# Altium PCB Alim12_Mot.PcbDoc
Units mm, origin at the board's own origin, x right, y up, seen from the top; angles counter-clockwise.
Board outline 105.41 x 61.06 mm, 2 copper layers (Component Side, Bottom Layer), stack 1.731 mm thick; 54 components, 34 nets, 159 pads, 19 vias.
Unrouted connection lines stored in the file: 1.
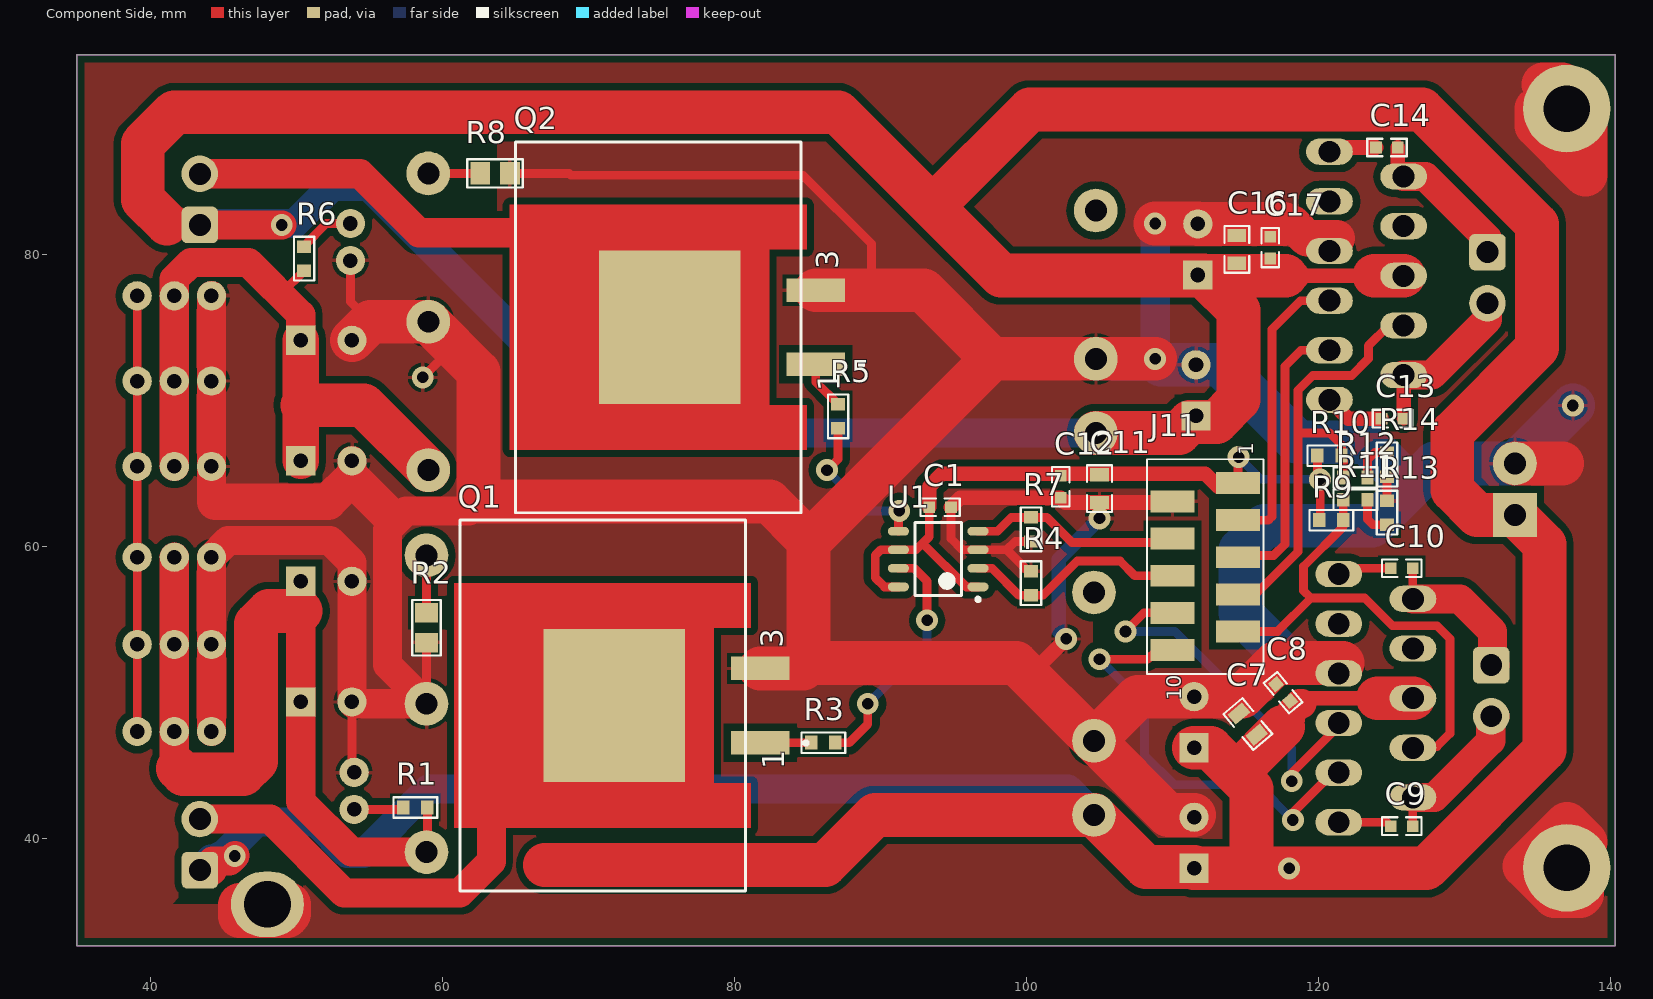
[diagram p0: Component Side view]
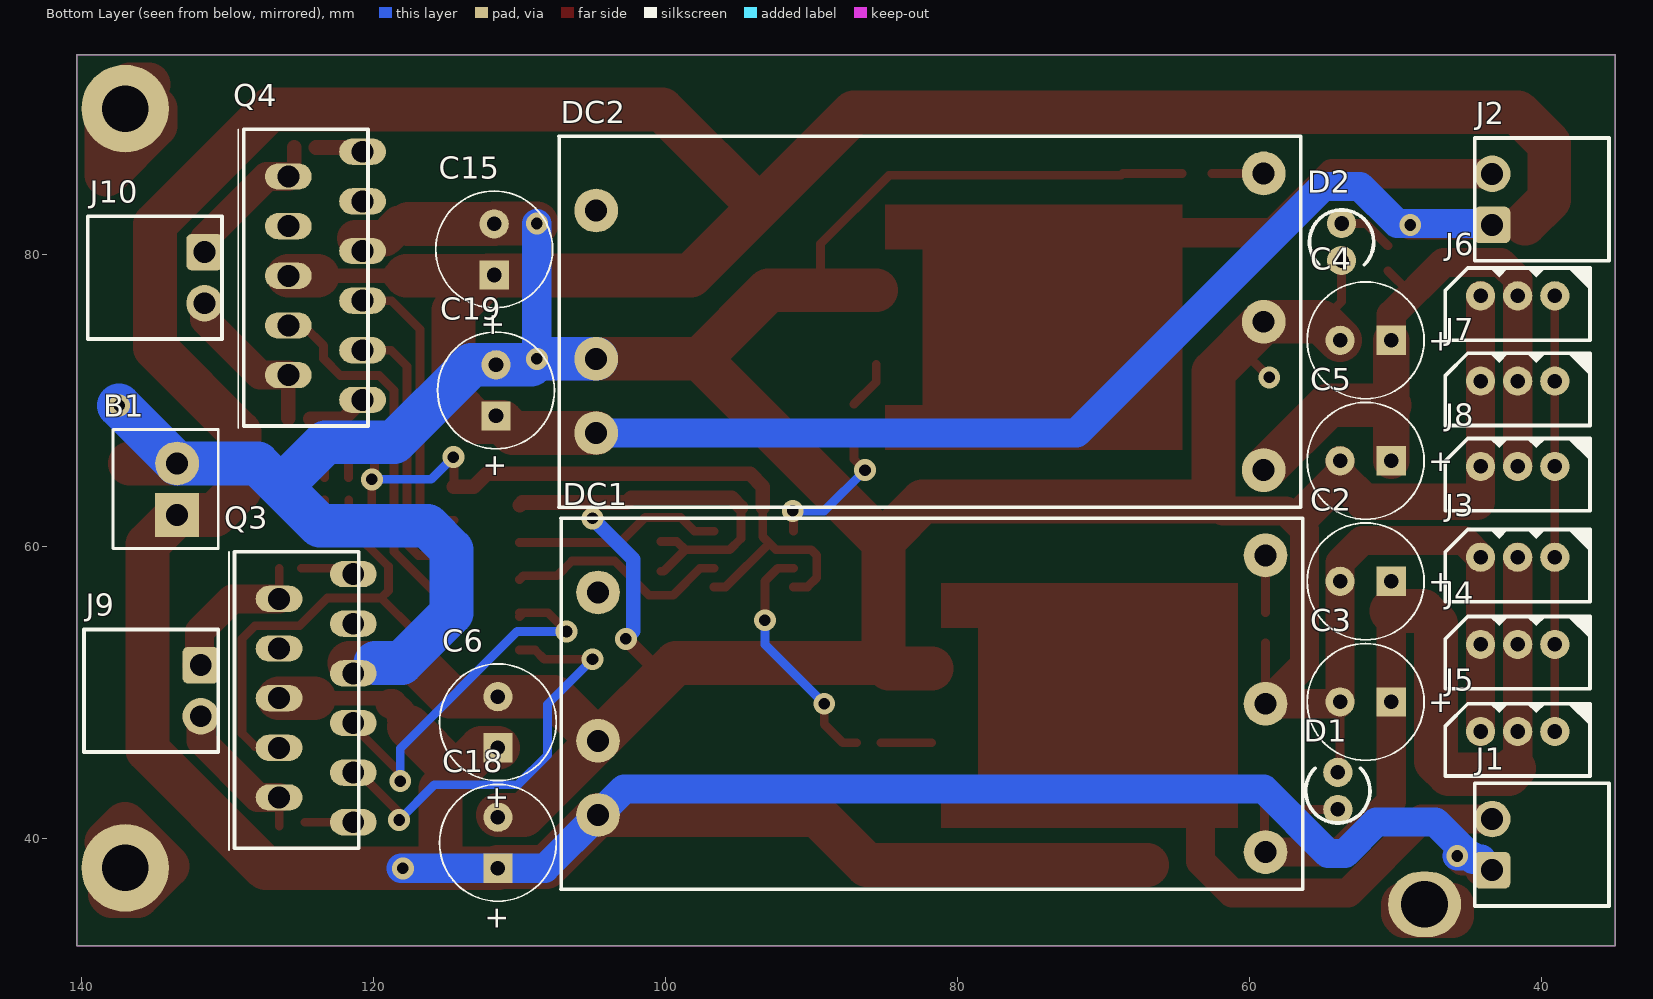
[diagram p1: Bottom Layer view, seen from below]
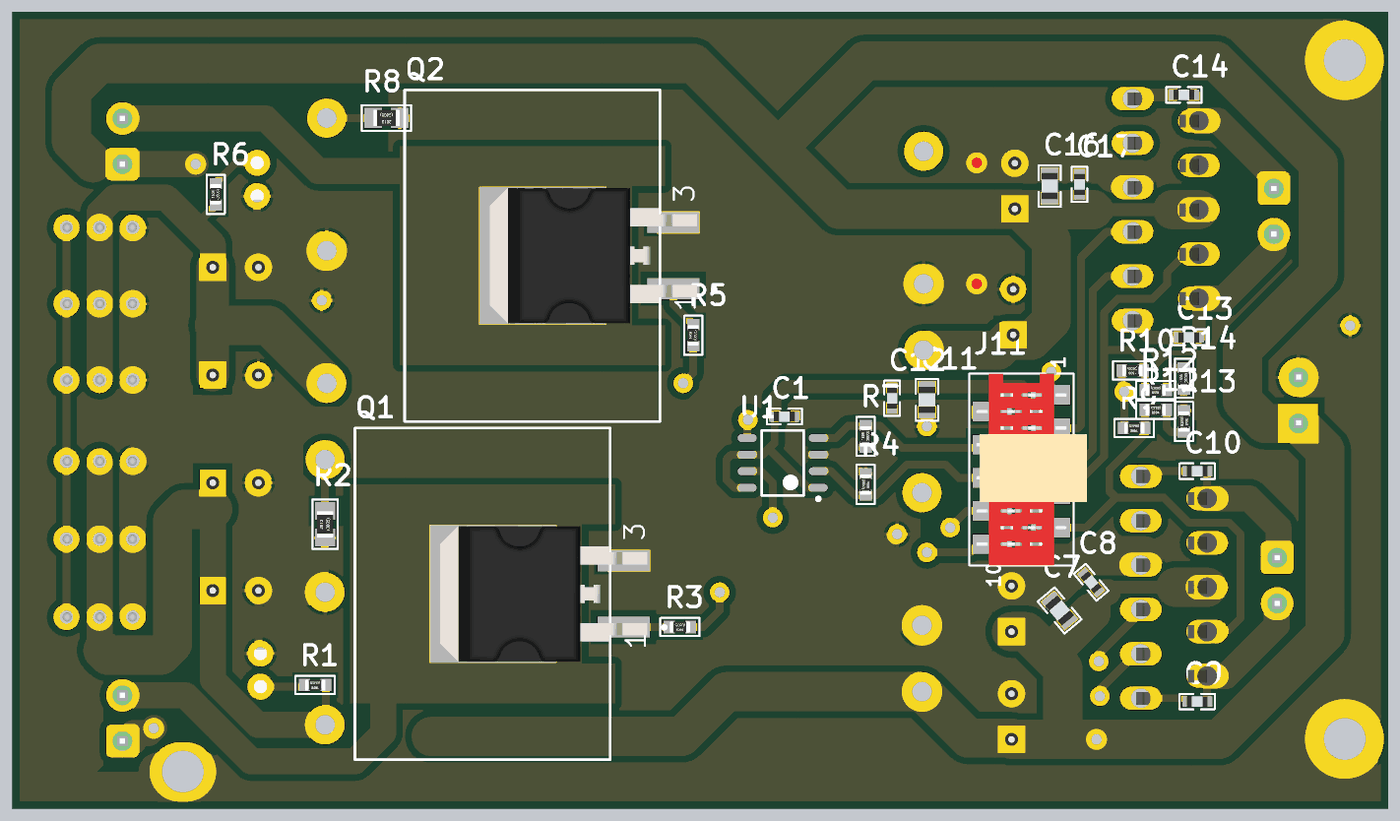
[diagram p2: 3D render of the assembled board from above, using the file's embedded part models]
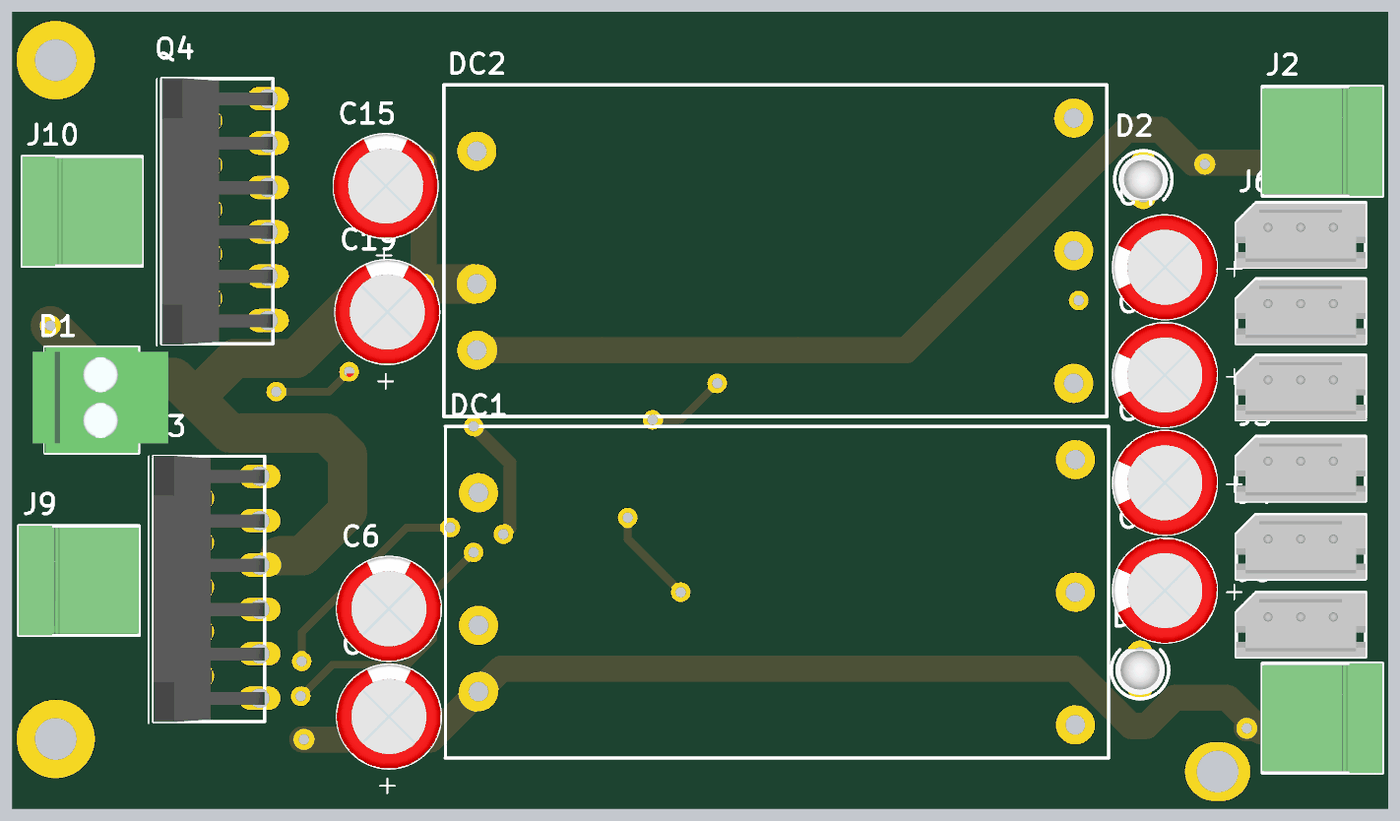
[diagram p3: 3D render of the assembled board from below, using the file's embedded part models]

## Layer stack, top to bottom
Top Solder: solder mask 0.0102, Solder Resist, Dk 3.5
Component Side: signal copper 0.0356
Dielectric 1: core 1.66, FR-4, Dk 4.2
Bottom Layer: signal copper 0.0356
Solder Side: solder mask 0.0102, Solder Resist, Dk 3.5

## Board outline
34.925,32.655 140.335,32.655 140.335,93.71 34.925,93.71

## Design rules (kind name [scope] priority, off if disabled: settings)
AssemblyTestPointUsage [All] p1 off:
AssemblyTestpoint [All] p1 off: testpointundercomponent=TRUE minsize=1.016 maxsize=2.54 preferedsize=1.524 minholesize=0 maxholesize=1.016 preferedholesize=0.813 testpointgrid=0.025 usegrid=TRUE gridtolerance=0 allowsidetop=TRUE allowsidebottom=TRUE
Clearance [All] p1: gap=0.5
ComponentClearance [All] p1: gap=0.2 collisioncheckmode=3 verticalgap=1 showdistances=FALSE
DiffPairsRouting [All] p1 off: maxlimit=0.254 minlimit=0.254 mostfreqgap=0.254 toplayer_minwidth=0.381 toplayer_maxwidth=0.381 toplayer_prefwidth=0.381 bottomlayer_minwidth=0.381 bottomlayer_maxwidth=0.381 bottomlayer_prefwidth=0.381 maxuncoupledlength=12.7
FabricationTestPointUsage TestPointUsage [All] p1 off: valid=0 allowmultiple=FALSE
FabricationTestpoint Testpoint [All] p1 off: side=3 testpointundercomponent=TRUE minsize=1.016 maxsize=2.54 preferedsize=1.524 minholesize=0 maxholesize=1.016 preferedholesize=0.813 testpointgrid=0.025 allowsidetop=TRUE allowsidebottom=TRUE usegrid=TRUE gridtolerance=0
FanoutControl Fanout_BGA [IsBGA] p1 off: bgadir=Out bgaviamode=Centered fanoutstyle=Auto fanoutdirection=Alternating viagrid=0.025 // Fanout_BGA (Default Rule)
FanoutControl Fanout_LCC [IsLCC] p2 off: bgadir=Out bgaviamode=Centered fanoutstyle=Auto fanoutdirection=Alternating viagrid=0.025 // Fanout_LCC (Default Rule)
FanoutControl Fanout_SOIC [IsSOIC] p3 off: bgadir=Out bgaviamode=Centered fanoutstyle=Auto fanoutdirection=Alternating viagrid=0.025 // Fanout_SOIC (Default Rule)
FanoutControl Fanout_Small [(CompPinCount < 5)] p4 off: bgadir=Out bgaviamode=Centered fanoutstyle=Auto fanoutdirection=OutThenIn viagrid=0.025 // Fanout_Small (Default Rule)
FanoutControl Fanout_Default [All] p5 off: bgadir=Out bgaviamode=Centered fanoutstyle=Auto fanoutdirection=Alternating viagrid=0.025 // Fanout_Default (Default Rule)
HoleSize [All] p1: absolutevalues=TRUE maxlimit=6 minlimit=0.15 maxpercent=80.000 minpercent=20.000
HoleToHoleClearance [All] p1: gap=0.6 allowstackedmicrovias=TRUE
MinimumSolderMaskSliver [All] p1: minsoldermaskwidth=0.075
MinimumSolderMaskSliver SilkscreenOverComponentPads [All] p2 off: minsoldermaskwidth=0.254
NetAntennae [All] p1 off: netantennaetolerance=0
PlaneClearance [All] p1: clearance=0.5
PlaneConnect [All] p1: planeconnectstyle=Relief reliefexpansion=0.4 reliefentries=4 reliefconductorwidth=0.3 reliefairgap=0.2
PolygonConnect [All] p1: connectstyle=Relief reliefconductorwidth=0.25 reliefentries=4 polygonreliefangle="90 Angle" airgapwidth=0.254
RoutingVias [All] p1: holewidth=0.8 width=1.5 viastyle="Through Hole" minholewidth=0.2 minwidth=0.6 maxholewidth=0.8 maxwidth=1.5
SilkToSilkClearance [All] p1 off: silktosilkclearance=0.1
SolderMaskExpansion [All] p1: expansion=0.05
Width [All] p1: maxlimit=3 minlimit=0.15 preferedwidth=0.2
12 further rules are at their usual default settings.

## Components (designator, comment, footprint, x,y, rotation, side; value= is the part's Value field where it differs from the comment)
B1 "1776275-2" BORNIER_2V_3.5MM 133.444,62.197 r90 bottom
C1 "100nF" "WCAP-CSGP_0603, 1.6x0.8x0.8" 94.074,62.705 r180 top
C2 "470 uF" WCAP-ATG8_8x11.5x3.5x0.5 52.037,57.625 r180 bottom
C3 "470 uF" WCAP-ATG8_8x11.5x3.5x0.5 52.037,49.37 r180 bottom
C4 "470 uF" WCAP-ATG8_8x11.5x3.5x0.5 52.037,74.135 r180 bottom
C5 "470 uF" WCAP-ATG8_8x11.5x3.5x0.5 52.037,65.88 r180 bottom
C6 "220 uF" WCAP-ATG8_8x11.5x3.5x0.5 111.473,47.973 r270 bottom
C7 "1uF" "WCAP-CSGP_0805, 2x1.25x1.25" 115.156,47.846 r310 top
C8 "100nF" "WCAP-CSGP_0603, 1.6x0.8x0.8" 117.569,50.005 r310 top
C9 "10nF" "WCAP-CSGP_0603, 1.6x0.8x0.8" 125.697,40.861 r0 top
C10 "10nF" "WCAP-CSGP_0603, 1.6x0.8x0.8" 125.697,58.514 r0 top
C11 "1uF" "WCAP-CSGP_0805, 2x1.25x1.25" 104.996,63.975 r90 top
C12 "100nF" "WCAP-CSGP_0603, 1.6x0.8x0.8" 102.329,64.102 r90 top
C13 "10nF" "WCAP-CSGP_0603, 1.6x0.8x0.8" 125.062,68.773 r0 top
C14 "10nF" "WCAP-CSGP_0603, 1.6x0.8x0.8" 124.681,87.343 r0 top
C15 "220 uF" WCAP-ATG8_8x11.5x3.5x0.5 111.727,80.358 r270 bottom
C16 "1uF" "WCAP-CSGP_0805, 2x1.25x1.25" 114.394,80.358 r270 top
C17 "100nF" "WCAP-CSGP_0603, 1.6x0.8x0.8" 116.68,80.485 r270 top
C18 "220 uF" WCAP-ATG8_8x11.5x3.5x0.5 111.473,39.718 r270 bottom
C19 "220 uF" WCAP-ATG8_8x11.5x3.5x0.5 111.6,70.706 r270 bottom
D1 "LED" LED_3MM 53.942,43.274 r90 bottom
D2 "LED" LED_3MM 53.688,80.866 r270 bottom
DC1 "TEN 60-2412WIN" "TEN 60" 81.755,49.243 r0 bottom
DC2 "TEN 60-2412WIN" "TEN 60" 81.882,75.405 r0 bottom
J1 "691322110002" 691322110002 39.972,39.591 r90 bottom
J2 "691322110002" 691322110002 39.972,83.787 r90 bottom
J3 "22-03-5035" 20-03-5035 41.623,58.641 r180 bottom
J4 "22-03-5035" 20-03-5035 41.623,52.672 r180 bottom
J5 "22-03-5035" 20-03-5035 41.623,46.703 r180 bottom
J6 "22-03-5035" 20-03-5035 41.623,76.548 r180 bottom
J7 "22-03-5035" 20-03-5035 41.623,70.706 r180 bottom
J8 "22-03-5035" 20-03-5035 41.623,64.864 r180 bottom
J9 "691322110002" 691322110002 135.222,50.132 r270 bottom
J10 "691322110002" 691322110002 134.968,78.425 r270 bottom
J11 "NoPins" 690367281076 112.235,58.641 r90 top
Q1 "IRF1018ESPBF" "D2Pak / AAVID 7109DG" 83.66,49.116 r90 top
Q2 "IRF1018ESPBF" "D2Pak / AAVID 7109DG" 87.47,75.024 r90 top
Q3 "LMD18200T" LMD18200T 125.316,49.624 r90 bottom
Q4 "LMD18200T" LMD18200T 124.681,78.552 r90 bottom
R1 "RC0603FR-071KL" RESC1608X06N 58.133,42.131 r180 top
R2 "4.3k" RESC2012X06M 58.895,54.45 r90 top
R3 "RC0603FR-0733RL" RESC1608X06N 86.073,46.576 r180 top
R4 "RC0603FR-07100KL" RESC1608X06N 100.297,57.498 r270 top
R5 "RC0603FR-0733RL" RESC1608X06N 87.089,68.928 r90 top
R6 "RC0603FR-071KL" RESC1608X06N 50.513,79.723 r90 top
R7 "RC0603FR-07100KL" RESC1608X06N 100.297,61.181 r90 top
R8 "4.3k" RESC2012X06M 63.594,85.565 r180 top
R9 "RC0603FR-0710KL" RESC1608X06N 120.871,61.816 r180 top
R10 "RC0603FR-0710KL" RESC1608X06N 120.744,66.233 r180 top
R11 "RC0603FR-0710KL" RESC1608X06N 122.522,63.213 r180 top
R12 "RC0603FR-0710KL" RESC1608X06N 122.522,64.737 r180 top
R13 "RC0603FR-0710KL" RESC1608X06N 124.681,62.324 r270 top
R14 "RC0603FR-0710KL" RESC1608X06N 124.681,65.626 r90 top
U1 "PM8834" SOIC127P600X175-8N 93.947,59.149 r180 top

## Footprints (in the part's own frame and the unit in brackets; to place one, negate y for a bottom-side part, rotate by r counter-clockwise, add the part's x,y. Pads: shape width x height; smd on the part's side, far side on the other; paste and mask are expansions set on the pad)
20-03-5035 [mm]
  round 2 hole 1: 1(2.54,0.635) 2(0,0.635) 3(-2.54,0.635)
  silkscreen extent -4.95,-2.41 4.95,2.54, body extent -4.96,-2.44 4.94,2.46, height 5.95
690367281076 [mm] "without Latch, 10 pins, SMT, straight"
  rect 1.5x3 smd: 1(5.715,-2.25) 2(4.445,2.25) 3(3.175,-2.25) 4(1.905,2.25) 5(0.635,-2.25) 6(-0.635,2.25) 7(-1.905,-2.25) 8(-3.175,2.25) 9(-4.445,-2.25) 10(-5.715,2.25)
  silkscreen extent -7.35,-4 7.35,4, body extent -7.35,-5 7.35,3.5, height 5.7
691322110002 [mm] "Horizontal PCB Header, pitch 3.5mm, 02p"
  rrect30% 2.5x2.5 hole 1.5: 1(-1.75,3.4)
  round 2.5 hole 1.5: 2(1.75,3.4)
  silkscreen extent -4.2,-4.6 4.2,4.6, body extent -4.2,-4.6 4.2,4.6, height 7.3
BORNIER_2V_3.5MM [mm]
  rect 3x3 hole 1.5: 1(-0.025,0)
  round 3 hole 1.5: 2(3.5,0)
  silkscreen extent -2.31,-2.82 5.84,4.39, body extent -2.27,-5.08 5.83,5.32, height 21.81
"D2Pak / AAVID 7109DG" [mm] "D2-PAK; 3 Leads (1 Cropped); Body 15.2 (inc. leads) x 10.9 mm (LxW max)"
  rect 1.61x4 smd: 1(-2.54,1.905) 3(2.54,1.905)
  rect 10.49x9.68 smd: 2(0,11.905)
  Component Side region: -5.334,5.08 5.334,5.08 5.334,2.54 8.382,2.54 8.382,22.86 -8.382,22.86 -8.382,2.54 -5.334,2.54
  silkscreen extent -12.7,-1.34 12.7,22.48, body extent -12.7,0.1 12.7,22.48, height 11.43
LED_3MM [mm]
  round 2 hole 1: 1(-1.27,0) 2(1.27,0)
  silkscreen extent -2.2,-2.2 1.56,2.2, body extent -1.9,-1.9 1.6,1.9, height 6
LMD18200T [mm]
  oval 1.8x3.2 hole 1.5: 1(-8.5,-3.937) 2(-6.8,1.143) 3(-5.1,-3.937) 4(-3.4,1.143) 5(-1.7,-3.937) 6(0,1.143) 7(1.7,-3.937) 8(3.4,1.143) 9(5.1,-3.937) 10(6.8,1.143) 11(8.5,-3.937)
  silkscreen extent -10.41,-4.32 10.03,4.57, body extent -10.32,-4.3 10.07,4.19, height 16.79
RESC1608X06N [mm] "Chip Resistor, 2-Leads, Body 1,6x0,8mm, IPC Medium Density"
  rect 0.85x0.95 smd: 1(-0.825,0) 2(0.825,0)
  silkscreen extent -1.5,-0.7 1.5,0.7, body extent -0.77,-0.42 0.78,0.43, height 0.8
RESC2012X06M [mm] "Chip Resistor, 2-Leads, Body 2,0x1,3mm, IPC Low Density"
  rect 1.35x1.55 smd: 1(-1.025,0) 2(1.025,0)
  silkscreen extent -1.9,-0.97 1.9,0.97, body extent -1,-0.62 1,0.63, height 0.45
SOIC127P600X175-8N [mm] "SOIC, 8-Leads, Body 4,90x3,90mm, Pitch 1,27mm, IPC Medium Density"
  oval 1.45x0.6 smd: 1(-2.725,1.905) 2(-2.725,0.635) 3(-2.725,-0.635) 4(-2.725,-1.905) 5(2.725,-1.905) 6(2.725,-0.635) 7(2.725,0.635) 8(2.725,1.905)
  silkscreen extent -2.85,-2.5 1.6,2.88, body extent -2,-2.5 2,2.5, height 1.75
"TEN 60" [mm]
  round 3 hole 1.5: 1(22.86,7.62) 2(22.86,2.54) 3(22.86,-7.62) 4(-22.86,10.16) 5(-22.86,0) 6(-22.86,-10.16)
  silkscreen extent -25.4,-12.7 25.4,12.7, body extent -25.49,-12.83 25.31,12.57, height 10.2
WCAP-ATG8_8x11.5x3.5x0.5 [mm] "Polarized capacitors, Aluminum Electrolytic Capacitors, 2-Leads, Body 8x11.5x3.5x0.5"
  rect 2x2 hole 1: 1(1.75,0)
  round 2 hole 1: 2(-1.75,0)
  silkscreen extent -4,-4 4,4, body extent -3.99,-4 4,4, height 11.61
"WCAP-CSGP_0603, 1.6x0.8x0.8" [mm] "WCAP-CSGP Ceramic Capacitors, size 0603, body 1.6x0.8x0.8"
  rect 0.8x0.8 smd: 1(-0.75,0) 2(0.75,0)
  silkscreen extent -1.35,-0.6 1.35,0.6, body extent -0.8,-0.4 0.8,0.4, height 0.8
"WCAP-CSGP_0805, 2x1.25x1.25" [mm] "WCAP-CSGP Ceramic Capacitors, size 0805, body 2x1.25x1.25"
  rect 0.9x1.3 smd: 1(-0.95,0) 2(0.95,0)
  silkscreen extent -1.6,-0.85 1.6,0.85, body extent -1,-0.62 1,0.63, height 1.22

## Part data
B1: "TERM BLOCK 2POS SIDE ENT 3.5MM"
C1 C8 C12 C17: library part "WCAP-CSGP, 885012206095", "CAP CER 100nF 50V X7R 0603"
C2 C3 C4 C5: library part "WCAP-ATG8, 860010374012", "CAP Alu 470 UF 20% 16 V"
C6 C15 C18 C19: library part "WCAP-ATG8, 860010574011", "CAP Alu 220 UF 20% 35 V"
C7 C11 C16: library part "WCAP-CSGP, 885012207103", "CAP CER 1uF 50V X7R 0805"
C9 C10 C13 C14: library part "WCAP-CSGP, 885012206089", "CAP CER 10nF 50V X7R 0603"
D1 D2: "LED 3mm - generique"
DC1 DC2: "Traco 12.0V 60W 5A"
J1 J2 J9 J10: "TERM BLOCK HDR 2POS 90DEG 3.5MM"
J3 J4 J5 J6 J7 J8: library part 20-03-5035
J11: library part 690367281076, "WR-MM Female SMT Connector with Polarization"
Q1 Q2: "MOSFET N-CH 60V 79A D2PAK"
R1 R6: "RES SMD 1K OHM 1% 1/10W 0603"
R2 R8: library part any, "RESISTOR"
R3 R5: "RES SMD 33 OHM 1% 1/10W 0603"
R4 R7: "RES SMD 100K OHM 1% 1/10W 0603"
R9 R10 R11 R12 R13 R14: "RES SMD 10K OHM 1% 1/10W 0603"
U1: "IC MOSFET DVR 4A DUAL 8SOIC"

## Free pads (board coordinates)
  oval 5x4.5 hole 3.2: 2(48,35.5)
  round 6 hole 3.2: 2(137,38) 2(137,90)

## Via types
v1: diameter 1.5, hole 0.8, Component Side to Bottom Layer, 19 vias

## Nets (pads, with @x,y where several pads share a name; then routed paths per layer and width w, separated by ;. In a path a pad name is that pad's centre, name@x,y a point inside that pad or via, vN(x,y) a via of type N, cw(c..) or ccw(c..) an arc to the next point about the centre after c; other vN are vias at no path point)
5L: C1.2 C11.2 C12.2 J11.1 R9.2 R10.2 U1.1 U1.6 U1.8 | length 50.4
  Component Side w0.6: U1.8 90.264,57.244 89.629,57.879 89.629,59.403 90.01,59.784 U1.6 92.423,59.784 92.873,60.234 ; C1.2 93.324,60.685 92.873,60.234 ; U1.1 95.864,57.244 92.873,60.234 ; J11.1 114.485,66.098 v1(114.521,66.134) ; R10.2 119.919,64.8 v1(120.109,64.61) R9.2@120.109,61.879
  Component Side w1: C1.2 93.324,64.114 94.201,64.991 112.235,64.991 113.124,64.102 J11.1@114.485,64.102
  Bottom Layer w0.6: v1(114.521,66.134) 116.045,64.61 v1(120.109,64.61)
12V_1: C2.1 C3.1 DC1.4 J3.2 J4.2 J5.2 R1.1 | length 59.4
  Component Side w0.6: DC1.4@58.958,39.146 R1.1
  Component Side w2: J3.2 J4.2 J5.2 41.623,45.052 41.877,44.798 ; 50.287,55.593 C3.1 50.287,42.55 53.754,39.083 DC1.4
  Component Side w3: 41.877,44.798 42.258,44.417 46.322,44.417 47.211,45.306 47.211,54.704 48.1,55.593 50.287,55.593
12V_2: C4.1 C5.1 DC2.4 J6.2 J7.2 J8.2 R6.1 | length 46.1
  Component Side w0.6: 48.989,77.374 R6.1
  Component Side w2: J8.2 J7.2 J6.2 41.623,78.326 42.766,79.469 46.703,79.469 50.287,75.885 C4.1
  Component Side w2.5: C5.1 C4.1
  Component Side w3: 50.414,69.69 54.577,69.69 DC2.4
DNMXL_DATA: J3.1 J4.1 J5.1 J6.1 J7.1 J8.1 | length 29.8
  Component Side w0.6: J5.1 J4.1 J3.1 J8.1 J7.1 J6.1
GND: B1.2 C1.1 C2.2 C3.2 C4.2 C5.2 C6.2 C7.1 C8.1 C11.1 C12.1 C15.2 C16.1 C17.1 C18.2 C19.2 D1.2 D2.2 DC1.2 DC1.5 DC2.2 DC2.5 J3.3 J4.3 J5.3 J6.3 J7.3 J8.3 J11.2 pad.2 Q1.3 Q2.3 Q3.7 Q4.7 R2.1 R4.1 R7.1 R8.1 R13.1 R14.1 U1.3 | length 445.7
  Component Side w0.6: D2.2 53.688,76.774 55.057,75.405 ; D1.2@53.787,44.699 C3.2 ; v1(58.641,71.595) 60.673,73.627 ; DC1.5 R2.1 ; R8.1 68.674,85.565 ; 68.801,85.438 84.676,85.438 89.375,80.739 89.375,77.564 ; C1.1 94.824,60.558 95.598,59.784 U1.3 98.646,59.784 ; R4.1 100.107,58.323 98.646,59.784 ; R7.1 99.218,60.356 98.646,59.784 ; R13.1 R14.1
  Component Side w1: C1.1 95.471,63.352 C12.1 102.656,63.025 C11.1 ; 101.059,52.037 v1(102.71,53.688) ; v1(104.996,61.943) C11.1 ; J11.2@109.985,62.832 109.792,63.025 C11.1
  Component Side w2: J5.3 J4.3 J3.3 45.306,60.419 52.291,60.419 53.787,58.923 C2.2 C3.2 53.914,49.243 DC1.5 56.228,51.91 56.228,61.181 57.244,62.197 ; J6.3 J7.3 J8.3 44.163,63.34 44.417,63.086 ; 53.787,64.709 C5.2 ; 56.299,62.197 57.244,62.197 ; 62.451,63.086 61.816,62.451 57.498,62.451 57.244,62.197 ; 117.597,82.108 118.232,82.108
  Component Side w2.5: 44.417,63.086 52.164,63.086 53.787,64.709 56.299,62.197 ; 118.232,82.108 119.22,81.12 Q4.7@121.252,81.12
  Component Side w3: pad.2@46.101,35.461 46.101,34.705 49.337,34.705 49.497,34.865 49.497,35.5 pad.2@48,35.5 ; C4.2 55.057,75.405 DC2.5 62.451,71.976 62.451,63.086 82.39,63.086 84.803,60.673 ; Q1.3 84.676,51.656 ; Q2.3 89.375,77.564 92.931,77.564 97.63,72.865 ; v1(108.806,72.865) DC2.2 97.63,72.865 ; v1(108.806,82.136) C15.2@111.727,82.136 ; C18.2@111.473,41.623 109.695,41.623 DC1.2 ; C15.2 117.597,82.108 ; Q3.7@121.633,52.037 117.061,52.037 114.747,49.723 C6.2 107.635,49.723 DC1.2 ; B1.2 136.69,65.697 ; pad.2@135.382,91.66 136.668,91.66 138.285,90.043 138.285,85.471 134.917,88.839 134.917,90 pad.2@137,90 ; pad.2@137,38 137,38.466 138.285,39.751 137.015,41.021 134.112,38.118 136.162,36.068 137.922,36.068 pad.2@138.049,36.195 ; 97.63,72.865 85.057,60.292 85.057,52.037 99.281,52.037 DC1.2
  Bottom Layer w0.6: v1(58.641,71.595) v1@58.768,71.595
  Bottom Layer w1: v1@102.837,53.688 102.71,53.561 v1(102.71,53.688) 102.202,54.196 102.202,59.149 v1(104.996,61.943)
  Bottom Layer w2: v1(108.806,72.865) v1(108.806,82.136)
  Bottom Layer w3: DC2.2 v1(108.806,72.865) 109.215,72.456 C19.2 113.279,72.456 118.585,67.15 123.284,67.15 126.332,64.102 ; 119.855,52.037 118.077,52.037 114.648,55.466 114.648,59.784 116.299,61.435 123.665,61.435 126.332,64.102 ; v1(137.414,69.667) B1.2 127.927,65.697 126.332,64.102
M1+: C10.2 J9.1 Q3.10 | length 10.8
  Component Side w0.6: Q3.10@126.447,56.436 C10.2
  Component Side w2: Q3.10 129.692,56.424 131.92,54.196 131.92,52.038 J9.1@132.076,51.882
M1-: C9.2 J9.2 Q3.2 | length 10.7
  Component Side w0.6: C9.2 Q3.2@126.447,42.812
  Component Side w2: Q3.2 127.914,42.824 131.793,46.703 131.793,48.099 J9.2@132.076,48.382
M1_BRK: J11.9 Q3.4 R9.1 R11.2 | length 34.1
  Component Side w0.6: J11.9 117.188,54.196 119.474,56.482 ; R11.2 R9.1 121.696,61.371 118.966,58.641 118.966,56.99 119.474,56.482 ; Q3.4 126.557,46.322 128.11,46.322 128.999,47.211 128.999,53.688 128.11,54.577 125.062,54.577 123.157,56.482 119.474,56.482
M1_DIR: J11.10 Q3.3 | length 29.9
  Component Side w0.6: v1(104.996,52.291) 108.298,52.291 108.933,52.926 J11.10 ; v1(118.237,41.275) 118.237,41.783 120.978,44.524 Q3.3
  Bottom Layer w0.6: v1(104.996,52.291) 108.077,49.21 108.077,45.72 110.109,43.688 115.824,43.688 v1(118.237,41.275)
M1_PWM: J11.8 Q3.5 | length 26.4
  Component Side w0.6: v1(106.774,54.196) 108.044,55.466 J11.8 ; J11.8@109.731,55.466 J11.8@109.985,55.212 ; v1(118.16,43.942) 118.11,43.942 118.11,44.45 121.379,47.719 Q3.5
  Bottom Layer w0.6: v1(106.774,54.196) 110.142,54.196 118.16,46.178 v1(118.16,43.942)
M2+: C14.2 J10.1 Q4.10 | length 10
  Component Side w1: Q4.10@125.431,85.744 C14.2
  Component Side w2: Q4.10 127.308,85.352 131.568,81.091 J10.1
M2-: C13.2 J10.2 Q4.2 | length 11.4
  Component Side w1: C13.2@125.824,68.785 Q4.2
  Component Side w2: Q4.2 127.759,71.752 131.568,75.561 J10.2
M2_BRK: J11.7 Q4.4 R10.1 R12.2 | length 31.2
  Component Side w0.6: J11.7@114.612,56.863 115.791,56.863 118.585,59.657 118.585,67.785 ; R10.1 121.569,66.96 120.744,67.785 118.585,67.785 ; R12.2 R10.1@121.697,66.105 ; Q4.4 124.809,75.152 123.411,73.754 123.411,72.865 122.268,71.722 119.601,71.722 118.585,70.706 118.585,67.785
M2_DIR: J11.5 Q4.3 | length 19.1
  Component Side w0.6: J11.5@114.612,59.403 116.934,59.403 117.696,60.165 117.696,72.357 118.791,73.452 Q4.3
M2_PWM: J11.3 Q4.5 | length 20
  Component Side w0.6: J11.3 116.553,61.816 116.807,62.07 116.807,74.897 118.762,76.852 Q4.5
NetC9_1: C9.1 Q3.1 | length 3.3
  Component Side w0.6: Q3.1 C9.1@124.684,41.124
NetC10_1: C10.1 Q3.11 | length 3.2
  Component Side w0.6: Q3.11@121.769,58.514 C10.1
NetC13_1: C13.1 Q4.1 | length 4.1
  Component Side w1: Q4.1 122.023,68.773 C13.1
NetC14_1: C14.1 Q4.11 | length 3.3
  Component Side w1: Q4.11 121.035,87.343 C14.1
NetD1_1: D1.1 R1.2 | length 3.2
  Component Side w0.6: D1.1 R1.2@57.181,42.004
NetD2_1: D2.1 R6.2 | length 3.8
  Component Side w0.6: R6.2@50.513,80.612 52.037,82.136 D2.1
NetDC1_6: DC1.6 R2.2 | length 3.9
  Component Side w0.6: R2.2 DC1.6
NetDC2_6: DC2.6 R8.2 | length 3.5
  Component Side w0.6: DC2.6 R8.2
NetQ1_1: Q1.1 R3.2 | length 3.5
  Component Side w0.6: Q1.1 R3.2
NetQ2_1: Q2.1 R5.2 | length 3.4
  Component Side w0.6: Q2.1 85.565,71.277 R5.2
NetR3_1: R3.1 U1.7 | length 16.5
  Component Side w0.6: R3.1 87.851,46.576 89.121,47.846 v1(89.121,49.243) ; U1.7 92.296,58.514 93.185,57.625 v1(93.185,54.958)
  Bottom Layer w0.6: v1(89.121,49.243) 93.185,53.307 v1(93.185,54.958)
NetR5_1: R5.1 U1.5 | length 10.7
  Component Side w0.6: v1(86.327,65.245) 87.089,66.007 R5.1 ; U1.5 91.222,62.393 v1(91.28,62.451)
  Bottom Layer w0.6: v1(86.327,65.245) 89.121,62.451 v1(91.28,62.451)
NetR11_1: R11.1 R13.2 | length 2.8
  Component Side w0.6: R11.1 123.347,61.88 123.728,61.499 R13.2
NetR12_1: R12.1 R14.2 | length 2.8
  Component Side w0.6: R12.1 123.347,65.943 123.855,66.451 R14.2
OUT1: J1.2 Q1.2 | length 36.4
  Component Side w2: J1.2 48.194,41.341 53.246,36.289 61.181,36.289 63.34,38.448 63.34,42.385 Q1.2@70.071,49.116
OUT2: J2.2 Q2.2 | length 25.2
  Component Side w2: J2.2 54.351,85.537 58.387,81.501 66.896,81.501
PWM1: J11.6 R4.2 U1.2 | length 15.6
  Component Side w0.6: U1.2 97.63,58.514 99.471,56.673 R4.2 101.123,56.673 103.472,59.022 106.393,59.022 107.409,58.006 109.731,58.006 J11.6@109.985,57.752
PWM2: J11.4 R7.2 U1.4 | length 14.4
  Component Side w0.6: U1.4 98.011,61.054 98.963,62.006 R7.2 101.377,62.006 103.091,60.292 J11.4@109.985,60.292
VBATT: B1.1 C6.1 C7.2 C8.2 C15.1 C16.2 C17.2 C18.1 C19.1 DC1.1 DC2.1 J1.1 J2.1 Q3.6 Q4.6 | length 471.1
  Component Side w1: 118.359,78.552 123.82,78.552 ; 119.347,49.624 124.046,49.624
  Component Side w2: 41.115,82.136 43.273,82.136 J2.1 v1(48.981,82.037) ; J1.1 44.238,37.841 44.238,38.461 45.408,38.461 v1@45.788,38.841 ; 117.569,47.667 118.077,48.175 118.077,48.608 118.712,49.243 118.839,49.243 ; 117.724,78.552 118.359,78.552
  Component Side w3: 41.115,82.136 39.464,83.787 39.464,87.597 41.623,89.756 87.089,89.756 93.566,83.279 ; 67.023,38.194 86.2,38.194 89.629,41.623 DC1.1 108.171,38.067 C18.1@111.473,38.067 ; DC2.1 110.429,67.785 111.191,68.547 112.997,68.547 114.521,70.071 114.521,76.167 C15.1@112.136,78.552 ; C18.1 115.41,37.968 ; C6.1 112.588,46.223 114.267,44.544 ; C15.1@111.784,78.552 C15.1@112.136,78.552 ; 117.569,47.667 114.446,44.544 114.267,44.544 ; 117.724,78.552 C15.1@112.136,78.552 ; 123.82,78.552 Q4.6 ; 124.046,49.624 Q3.6 ; 93.566,83.279 98.265,78.58 112.108,78.58 C15.1@112.136,78.552 ; 93.566,83.279 100.238,89.951 127.092,89.951 134.968,82.075 134.968,73.627 129.159,67.818 129.159,63.881 130.868,62.172 B1.1 135.476,60.14 135.476,46.068 127.376,37.968 115.41,37.968 ; 114.267,44.544 115.41,43.401 115.41,37.968
  Bottom Layer w2: J1.1 J1.1@44.122,38.591 ; J2.1@43.372,81.91 43.598,82.136 49.878,82.136 52.418,84.676 54.958,84.676 71.849,67.785 DC2.1 ; v1(45.764,38.818) 44.738,38.818 44.511,38.591 J1.1@44.122,38.591 ; v1@118.115,37.968 C18.1 108.27,37.968 DC1.1 102.837,43.401 59.022,43.401 54.61,38.989 54.605,38.994 53.462,38.994 51.308,41.148 47.244,41.148 44.687,38.591 J1.1@44.122,38.591
  other v1: 117.983,37.968
pads on no net: DC1.3 DC2.3 Q3.8 Q3.9 Q4.8 Q4.9

## Polygon pours and split planes (outlines as drawn)
GND on Component Side "Component Side-No Net" (solid, remove dead copper, pour order 0): 34.925,32.655 34.925,93.71 140.335,93.71 140.335,32.655

## Keep-outs
Keep-Out Layer:
  the board outline again, w0.1

## Other copper
Component Side:
  pour cut-out: 63.754,88.011 63.754,82.804 62.992,82.804 62.738,82.55 62.23,83.058 62.23,88.011
  pour cut-out: 105.664,55.88 105.664,53.721 104.521,52.578 104.521,55.499
  pour cut-out: 48.514,35.5 48.701,35.687 50.419,35.687 50.419,37.592 47.625,40.386 47.603,40.364 41.91,40.364 41.91,35.941 41.469,35.5

## Text inside footprints (layer, text, board x,y; h text height)
C2: Bottom Overlay "+" at 47.737,56.925 h1.5
C3: Bottom Overlay "+" at 47.737,48.67 h1.5
C4: Bottom Overlay "+" at 47.737,73.435 h1.5
C5: Bottom Overlay "+" at 47.737,65.18 h1.5
C6: Bottom Overlay "+" at 112.173,43.673 h1.5 r90
C15: Bottom Overlay "+" at 112.427,76.058 h1.5 r90
C18: Bottom Overlay "+" at 112.173,35.418 h1.5 r90
C19: Bottom Overlay "+" at 112.3,66.406 h1.5 r90
J11: Top Overlay "10" at 110.584,49.497 h1 r90; Top Overlay "1" at 115.537,66.261 h1 r90
Q1: Top Overlay "3" at 83.304,53.078 h1.5 r90; Top Overlay "1" at 83.406,44.747 h1.5 r90
Q2: Top Overlay "3" at 87.114,78.986 h1.5 r90; Top Overlay "1" at 87.216,70.655 h1.5 r90